# EAGLE board poppy (EAGLE 6.4)
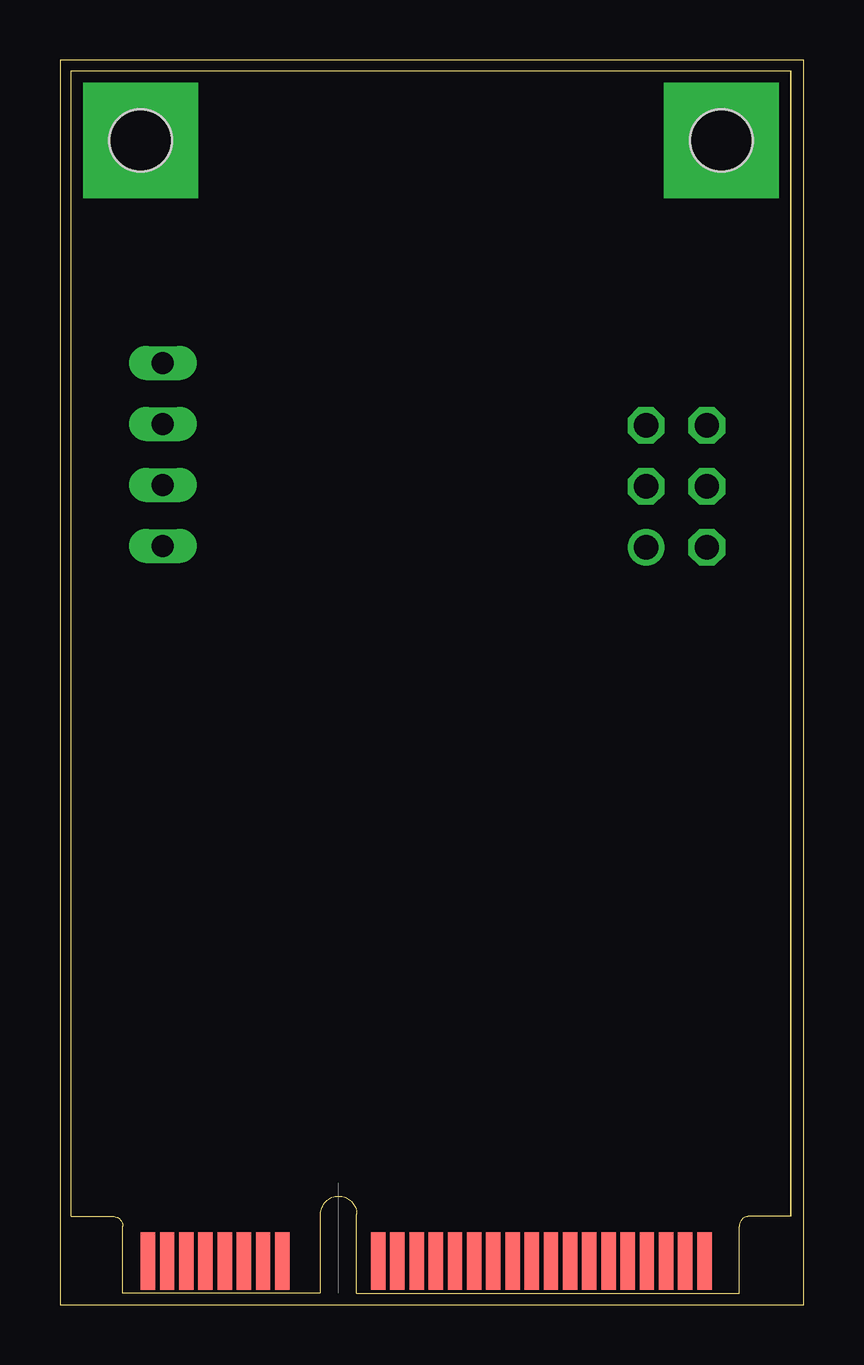
[diagram p0: board, top side]
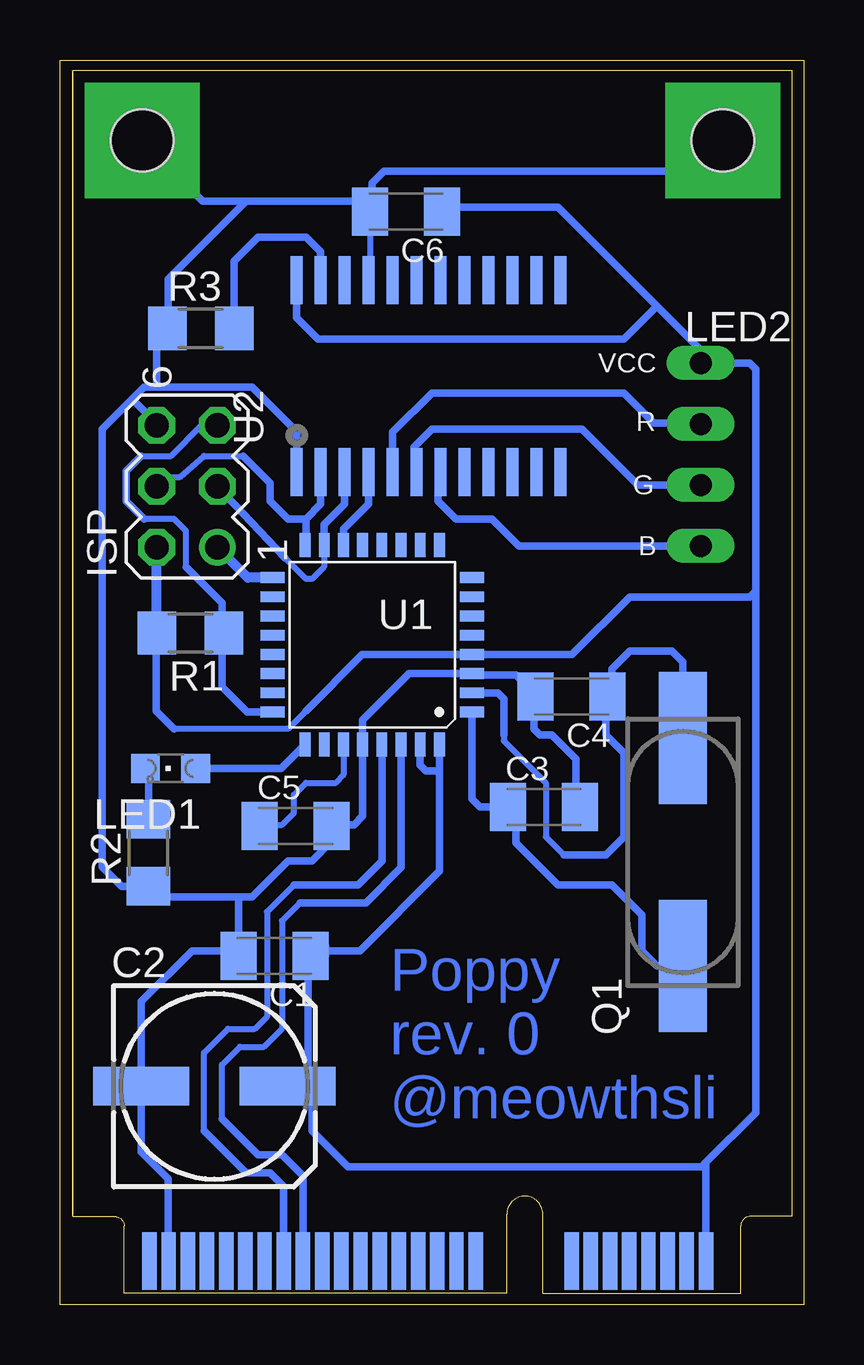
[diagram p1: board, bottom side, seen from below]

Size 31 x 51.88 mm. Coordinates in mm from the lower left corner, seen from the top.
Outline: 0,0 31,0 31,51.88 0,51.88 0,0
Copper layers (1*16): Top 0.035mm / dielectric 1.5mm / Bottom 0.035mm
Design rules "default *": minimum track width 10mil, minimum drill 24mil, track to track 8mil, track to pad 8mil, pad to pad 8mil, via to via 8mil, smd to smd 8mil, copper to edge 40mil, drill to drill 8mil, minimum pad ring 10mil, minimum via ring 8mil, stop-mask expansion 4mil, vias tented up to drill 0mil, thermal gap 10mil
Net classes: 0 default: clearance 0.355 mm

## Footprints (pad centres in the part's own frame; a part is rotated, then mirrored left to right if it is on the bottom)
C1206K = smd 1.5 x 2: 1 -1.5,0; 2 1.5,0
153CLV-0807 = smd 4 x 1.6: + 3.05,0; - -3.05,0
FULL-MINI-PCI-E = smd 0.6 x 2.4: 1 -7.95,1.45; 3 -7.15,1.45; 5 -6.35,1.45; 7 -5.55,1.45; 9 -4.75,1.45; 11 -3.95,1.45; 13 -3.15,1.45; 15 -2.35,1.45; 17 1.65,1.45; 19 2.45,1.45; 21 3.25,1.45; 23 4.05,1.45; 25 4.85,1.45; 27 5.65,1.45; 29 6.45,1.45; 31 7.25,1.45; 33 8.05,1.45; 35 8.85,1.45; 37 9.65,1.45; 39 10.45,1.45; 41 11.25,1.45; 43 12.05,1.45; 45 12.85,1.45; 47 13.65,1.45; 49 14.45,1.45; 51 15.25,1.45 | smd 0.6 x 2.4 bottom: 2 -7.55,1.45; 4 -6.75,1.45; 6 -5.95,1.45; 8 -5.15,1.45; 10 -4.35,1.45; 12 -3.55,1.45; 14 -2.75,1.45; 16 -1.95,1.45; 18 2.05,1.45; 20 2.85,1.45; 22 3.65,1.45; 24 4.45,1.45; 26 5.25,1.45; 28 6.05,1.45; 30 6.85,1.45; 32 7.65,1.45; 34 8.45,1.45; 36 9.25,1.45; 38 10.05,1.45; 40 10.85,1.45; 42 11.65,1.45; 44 12.45,1.45; 46 13.25,1.45; 48 14.05,1.45; 50 14.85,1.45; 52 15.65,1.45 | drill 2.6 pad 4.8 square: GND@1 -8.25,48.15; GND@2 15.95,48.15 | hole 2.6: -8.25,48.15; 15.95,48.15
MA03-2 = drill 1.016: 1 -2.54,-1.27 | drill 1.016 octagon: 2 -2.54,1.27; 3 0,-1.27; 4 0,1.27; 5 2.54,-1.27; 6 2.54,1.27
CHIPLED_0805 = smd 1.2 x 1.2: A 0,-1.05; C 0,1.05
CON-RGB-LED-TH-EXT = drill 0.914 long: 1.B 0,-3.81; 2.G 0,-1.27; 3.R 0,1.27; 4.VCC 0,3.81
CSM-7X-DU = smd 5.5 x 2: 1 -4.75,0; 2 4.75,0
R3216 = smd 1.6 x 1.8: 1 -1.4,0; 2 1.4,0
VQFP32 = smd 1 x 0.45: 1 -4.15,2.8; 2 -4.15,2; 3 -4.15,1.2; 4 -4.15,0.4; 5 -4.15,-0.4; 6 -4.15,-1.2; 7 -4.15,-2; 8 -4.15,-2.8; 17 4.15,-2.8; 18 4.15,-2; 19 4.15,-1.2; 20 4.15,-0.4; 21 4.15,0.4; 22 4.15,1.2; 23 4.15,2; 24 4.15,2.8 | smd 0.45 x 1: 9 -2.8,-4.15; 10 -2,-4.15; 11 -1.2,-4.15; 12 -0.4,-4.15; 13 0.4,-4.15; 14 1.2,-4.15; 15 2,-4.15; 16 2.8,-4.15; 25 2.8,4.15; 26 2,4.15; 27 1.2,4.15; 28 0.4,4.15; 29 -0.4,4.15; 30 -1.2,4.15; 31 -2,4.15; 32 -2.8,4.15
SOP24-300-1.00 = smd 0.5 x 2: 1 -5.48,-4.08; 2 -4.48,-4.08; 3 -3.48,-4.08; 4 -2.48,-4.08; 5 -1.48,-4.08; 6 -0.48,-4.08; 7 0.52,-4.08; 8 1.52,-4.08; 9 2.52,-4.08; 10 3.52,-4.08; 11 4.52,-4.08; 12 5.52,-4.08; 13 5.52,3.92; 14 4.52,3.92; 15 3.52,3.92; 16 2.52,3.92; 17 1.52,3.92; 18 0.52,3.92; 19 -0.48,3.92; 20 -1.48,3.92; 21 -2.48,3.92; 22 -3.48,3.92; 23 -4.48,3.92; 24 -5.48,3.92

## Placement (x,y rotation side)
C1  100n  [C1206K]  22.06,14.54 180 bottom
C2  10u  [153CLV-0807]  24.56,9.1 0 bottom
C3  22p  [C1206K]  10.82,20.73 0 bottom
C4  22p  [C1206K]  9.67,25.34 180 bottom
C5  1u  [C1206K]  21.17,19.95 0 bottom
C6  100n  [C1206K]  16.57,45.55 180 bottom
EDGE  [FULL-MINI-PCI-E]  11.62,0.37 0 top
ISP  ISP1  [MA03-2]  25.7,34.1 90 bottom
LED1  LED  [CHIPLED_0805]  26.39,22.35 90 bottom
LED2  CON-RGB-LED-EXT  [CON-RGB-LED-TH-EXT]  4.29,35.43 0 bottom
Q1  8MHz  [CSM-7X-DU]  5.03,18.86 90 bottom
R1  10k  [R3216]  25.56,27.99 180 bottom
R2  1k  [R3216]  27.31,18.83 90 bottom
R3  1k  [R3216]  25.12,40.69 0 bottom
U1  ATUSB  [VQFP32]  17.98,27.5 180 bottom
U2  MBI5039  [SOP24-300-1.00]  15.65,38.77 0 bottom

## Library data of the parts
C1-C6 R1-R3 = resistor
EDGE = mini-pci-e
ISP = con-lstb; OC_FARNELL: unknown; OC_NEWARK: unknown
LED1 = led
LED2 = _led-rgb
Q1 = crystal; OC_FARNELL: unknown; OC_NEWARK: unknown
U1 = at90usb
U2 = _LedDrivers

## Nets
D+: EDGE.38 U1.29
D-: EDGE.36 U1.30
GND: C1.2 C2.- C3.2 C4.2 C5.2 C6.2 EDGE.50 EDGE.GND@1 EDGE.GND@2 ISP.6 R2.1 R3.1 U1.3 U1.28 U2.1 U2.21
LATCH: U1.14 U2.4
MISO: ISP.1 U1.17
MOSI/DATA: ISP.4 U1.16 U2.2
N$1: LED1.A U1.25
N$2: R3.2 U2.23
N$3: LED2.3.R U2.5
N$4: C5.1 U1.27
N$5: LED2.2.G U2.6
N$6: LED2.1.B U2.7
N$7: LED1.C R2.2
RESET: ISP.5 R1.1 U1.24
SCK: ISP.3 U1.15 U2.3
VCC: C1.1 C2.+ C6.1 EDGE.2 ISP.2 LED2.4.VCC R1.2 U1.4 U1.31 U1.32 U2.24
XTAL1: C3.1 Q1.1 U1.1
XTAL2: C4.1 Q1.2 U1.2

## Tracks (layer width: path | path; a pad name or v marks a point on that pad's centre or on a via)
D+
  Bottom 0.254: 25,7.25 25,10.5 24,11.5 22.88,11.5 22.38,12 22.38,16.38 21.25,17.5
  Bottom 0.305: EDGE.38 21.67,4.92 22.25,5.5 23.25,5.5 25,7.25 | 21.25,17.5 18.58,17.5 17.58,18.5 U1.29
D-
  Bottom 0.254: 24.25,7.75 24.25,10 23.5,10.75 22.5,10.75 21.75,11.5 21.75,16 21,16.75
  Bottom 0.305: EDGE.36 20.87,5.37 21.75,6.25 22.75,6.25 24.25,7.75 | 21,16.75 18.25,16.75 16.78,18.22 U1.30
GND
  Bottom 0.254: 26.47,9.01 C2.- | 18.07,42.69 U2.21 18.07,42.74 18.07,45.27 | 18,46.12 C6.2 | 26.5,9.16 C2.- | 27.75,9.16 C2.- | R3.1 26.5,40.64 | 19.62,19.91 C5.2
  Bottom 0.305: C2.- 27.61,12.64 25.5,14.75 23.77,14.75 | EDGE.50 26.5,1.85 26.5,5.25 27.61,6.36 C2.- | C2.- 27.5,8.99 | 9.5,20.91 9.5,22.75 10.5,23.75 11,23.75 11.25,24 11.25,25.26 C4.2 11.17,25.42 12,26.25 13.78,26.25 U1.3 16.45,26.3 18.38,24.37 U1.28 18.38,20.37 18.75,20 19.62,20 C5.2 | 18.07,45.27 18.07,45.58 18.5,46 23.25,46 | 23.25,46 26.5,42.75 26.5,40.71 R3.1 | 23.25,46 25.05,46 EDGE.GND@2 | 18,46.12 18,46.75 17.5,47.25 4.64,47.25 EDGE.GND@1 | 26.75,40.64 26.97,40.42 26.97,38.25 | U2.1 21.13,36.38 23,38.25 26.97,38.25 | ISP.6 26.97,36.72 28,37.75 | 28,37.75 29.25,36.5 29.25,18.25 28.43,17.43 R2.1 26.88,17 23.5,17 | 28,37.75 27.5,38.25 26.97,38.25 | 23.77,14.75 arc90 C1.2 | 19.67,19.33 20.5,18.5 21.5,18.5 23,17 23.5,17 | 23.5,17 23.56,16.94 C1.2 | 23.77,14.75 C1.2
  Bottom 0.406: 27.75,9.04 C2.- 27.5,9.41 | C5.2 19.67,19.33 | 26.5,40.64 26.75,40.64 | 18.07,45.27 C6.2 | 9.5,20.91 C3.2
LATCH
  Bottom 0.305: U2.4 18.13,33.37 19.18,32.32 U1.14
MISO
  Bottom 0.406: U1.17 23.17,30.3 ISP.1
MOSI/DATA
  Bottom 0.254: ISP.4 26.57,34.5 26,34.5 25,35.38 23.38,35.38
  Bottom 0.305: U2.2 20.13,33.37 20.75,32.75 | 20.75,32.75 20.75,31.68 U1.16 | 23.38,35.38 22.25,34.25 22.25,33.5 21.5,32.75 20.75,32.75
N$1
  Bottom 0.305: LED1.A 21.78,22.35 U1.25
N$2
  Bottom 0.305: U2.23 20.13,43.88 20.75,44.5 22.75,44.5 23.75,43.5 23.75,40.71 R3.2
N$3
  Bottom 0.305: U2.5 17.13,36.37 15.5,38 7.5,38 6.25,36.75 4.34,36.75 LED2.3.R
N$4
  Bottom 0.254: U1.27 19.18,22.07 19.5,21.75 20.75,21.75 21.25,21.25 21.25,20.5 21.75,20 22.38,20 22.5,20.12 C5.1
N$5
  Bottom 0.254: U2.6
  Bottom 0.305: LED2.2.G 6.91,34.16 9.25,36.5 15.5,36.5 16.25,35.75 16.25,34.81 U2.6
N$6
  Bottom 0.305: LED2.1.B 11.87,31.62 13,32.75 14.5,32.75 15.25,33.5 15.25,34.57 U2.7
N$7
  Bottom 0.305: R2.2 27.31,22.22 LED1.C
RESET
  Bottom 0.254: 27.5,32.75 26.25,32.75 25.75,32.25 25.75,30.75 | 27.62,35.38 26.38,35.38 25.11,36.64 ISP.5 | 24.25,27.88 R1.1 | R1.1 24.14,28.14 | 24.25,28.1 R1.1
  Bottom 0.305: 24.25,28.1 24.25,29.25 25.75,30.75 | 27.5,32.75 28.25,33.5 28.25,34.75 27.62,35.38 | 24.25,27.88 24.25,25.75 23.2,24.7 U1.24 22.18,24.75
SCK
  Bottom 0.254: U1.15 20,31.67 20,30.75 20.5,30.25 20.75,30.25 21.62,31.12
  Bottom 0.305: 21.62,31.12 ISP.3 | U2.3 19.13,33.37 19.98,32.52 U1.15
VCC
  Bottom 0.254: LED2.4.VCC | 27,27.97 R1.2 | 26.98,31.55 ISP.2 | C1.1 20.5,14.15 | 20.5,9.25 20.65,9.1 C2.+ | U1.31 16,23.33 | 26.25,24 21.5,24 20.75,24.75
  Bottom 0.305: 2,29.75 2.25,29.5 7.25,29.5 9.65,27.1 U1.4 18.4,27.1 20.75,24.75 | 4.07,5.93 4.25,5.75 19,5.75 20.5,7.25 20.5,8.95 20.65,9.1 20.65,13.85 20.5,14 | 2,29.75 2,8 4.07,5.93 | EDGE.2 4.07,5.93 | 27,27.95 27,24.75 26.25,24 | U1.32 15.18,22.25 | 15.18,22.25 15.18,18.07 18.5,14.75 20.35,14.75 | U1.31 15.98,22.48 15.75,22.25 15.18,22.25 | 2,29.75 2,39 2.25,39.25 LED2.4.VCC | LED2.4.VCC 4.3,39.8 6.12,41.62 | 6.12,41.62 10.25,45.75 14.88,45.75 C6.1 | U2.24 21.13,41.13 20.25,40.25 7.5,40.25 6.12,41.62
  Bottom 0.406: LED2.4.VCC | 20.5,14.15 20.5,14 20,14.5 20,15 20.5,14.5 | 20.35,14.75 C1.1 | 26.98,31.55 26.98,28.01 R1.2 27,27.95
XTAL1
  Bottom 0.305: C3.1 12,20.41 12,19.25 10.25,17.5 8,17.5 6.75,16.25 6.75,14.75 6.11,14.11 Q1.1 | 12.34,20.75 13.5,20.75 13.83,21.08 U1.1
  Bottom 0.406: 12.34,20.75 C3.1
XTAL2
  Bottom 0.254: 12.5,23.75 12.5,23.5 10.75,21.75 10.75,19.5 10,18.75
  Bottom 0.305: U1.2 12.75,25.5 12.5,25.25 12.5,23.75 | 8.25,25.26 8.25,23.75 7.5,23 7.5,19.5 8.25,18.75 10,18.75 | C4.1 8,25.51 8,26.5 7.25,27.25 5.5,27.25 5.03,26.78 Q1.2
  Bottom 0.406: 8.25,25.26 C4.1 | 5,23.64 Q1.2

## Text on the board
Bottom: Poppy / rev. 0 / @meowthsli